# Altium PCB 2.PcbDoc
Units mm, origin at the board's own origin, x right, y up, seen from the top; angles counter-clockwise.
Board outline 48.6 x 43.89 mm, 2 copper layers (Top Layer, Bottom Layer); 53 components, 33 nets, 159 pads, 24 vias.
Unrouted connection lines stored in the file: 5.
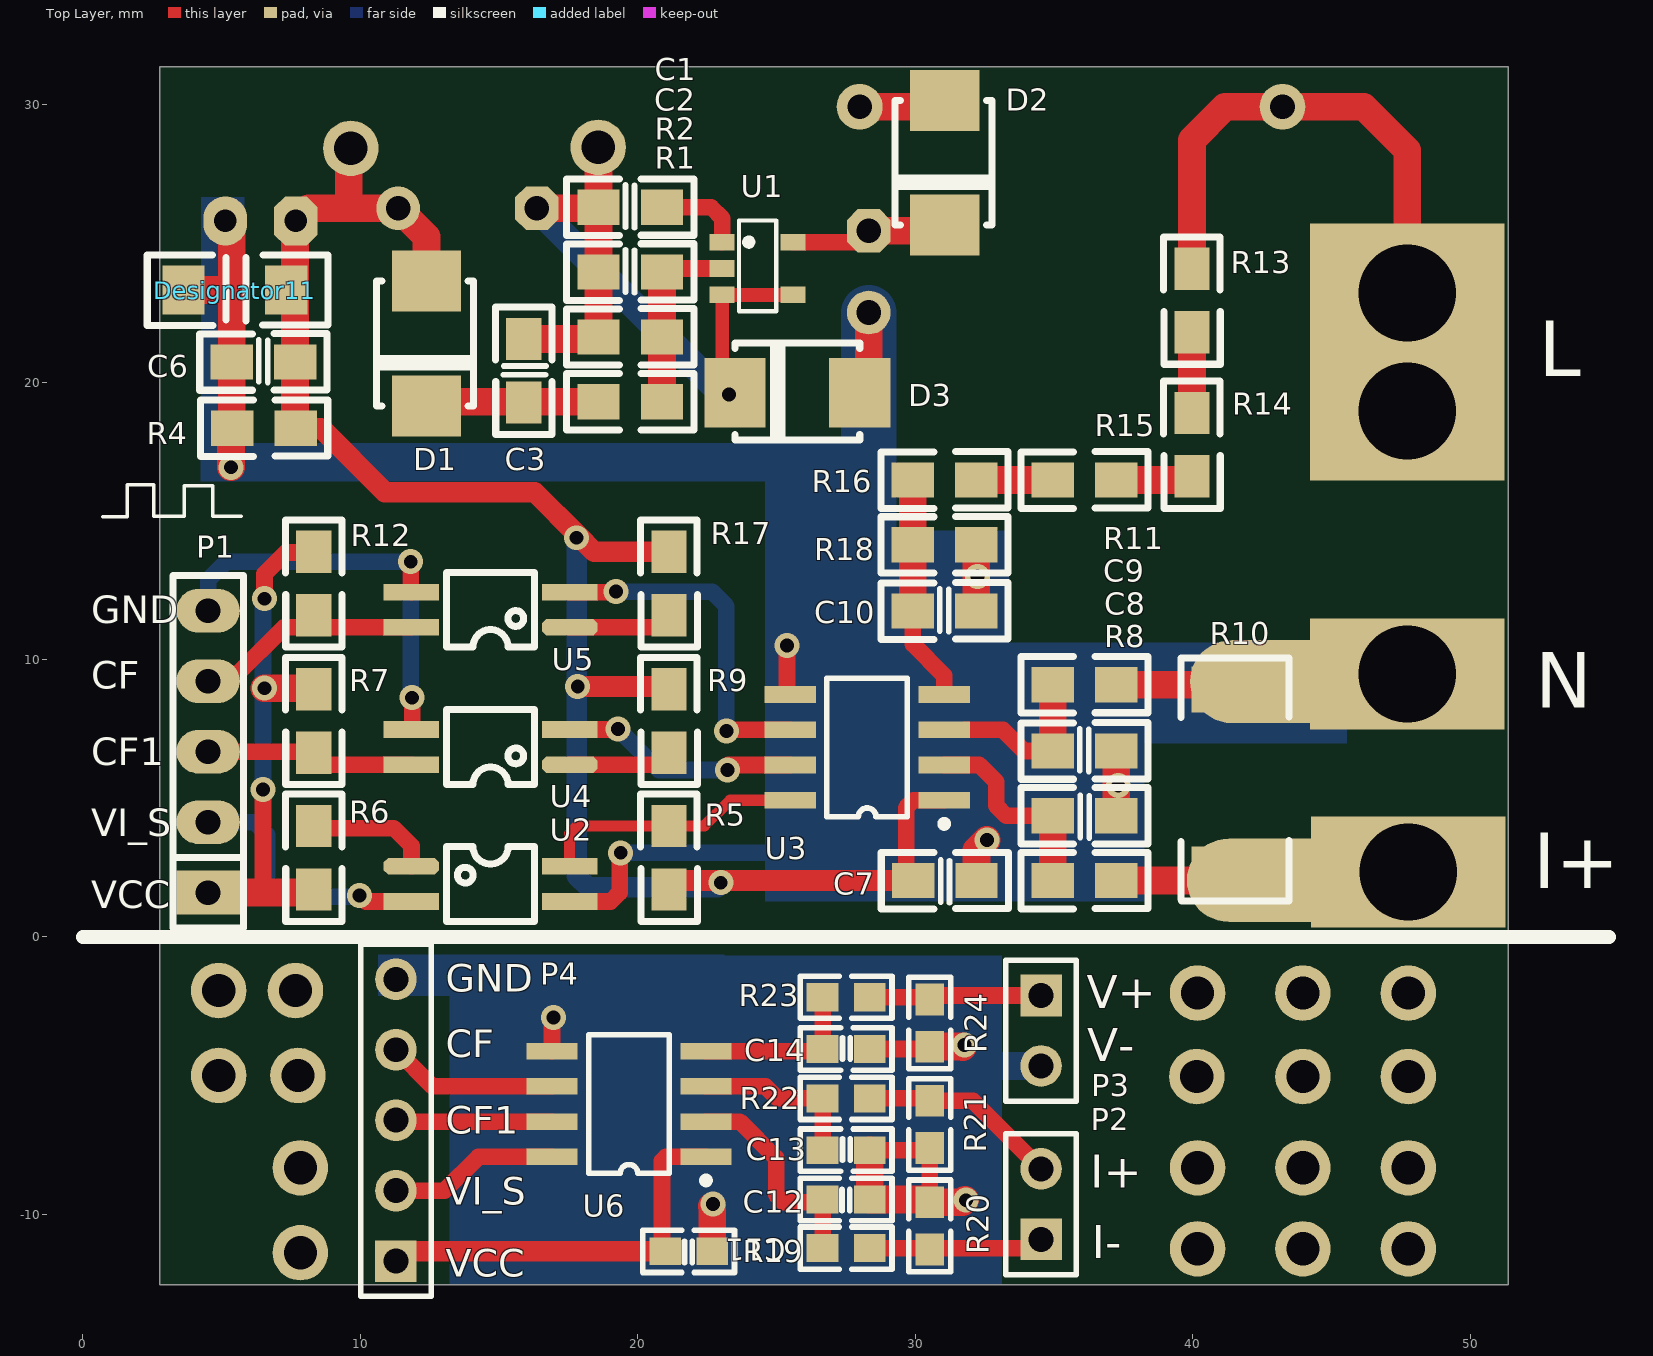
[diagram p0: Top Layer view]
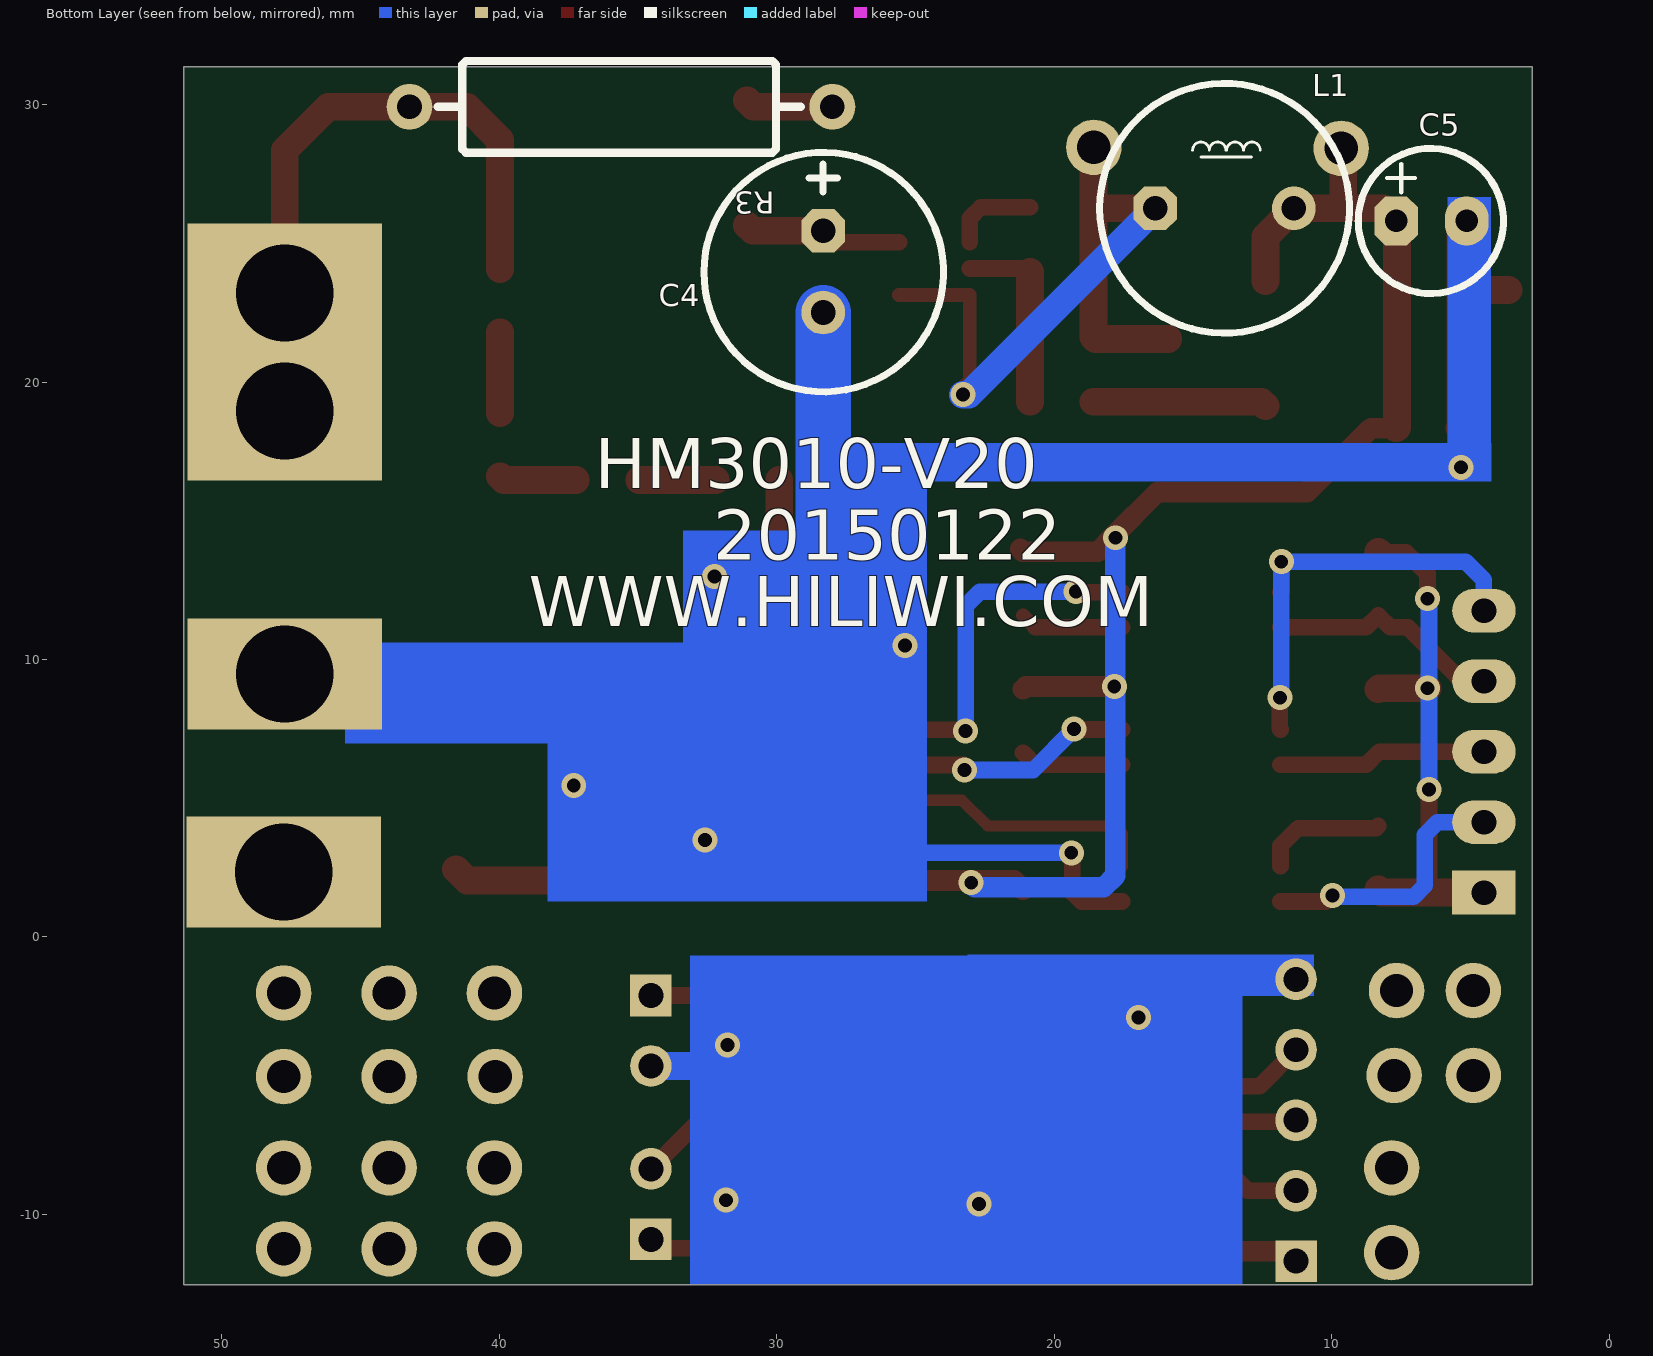
[diagram p1: Bottom Layer view, seen from below]

## Layer stack, top to bottom
Top Solder: solder mask 0.0102, Solder Resist, Dk 3.5
Top Layer: signal copper 0.0356
Dielectric1: dielectric 0.32, FR-4, Dk 4.8
Bottom Layer: signal copper 0.0356
Bottom Solder: solder mask 0.0102, Solder Resist, Dk 3.5

## Board outline
2.763,-12.536 51.366,-12.536 51.366,31.356 2.763,31.356

## Design rules (kind name [scope] priority, off if disabled: settings)
Clearance [All] p1: gap=0.254
ComponentClearance [All] p1 off: gap=0.254 collisioncheckmode=3 verticalgap=0.254 showdistances=FALSE
FabricationTestPointUsage TestPointUsage [All] p1: valid=0 allowmultiple=FALSE
FabricationTestpoint Testpoint [All] p1: side=3 testpointundercomponent=TRUE minsize=1.016 maxsize=2.54 preferedsize=1.524 minholesize=0 maxholesize=1.016 preferedholesize=0.813 testpointgrid=0.025 allowsidetop=TRUE allowsidebottom=TRUE usegrid=TRUE gridtolerance=0
FanoutControl Fanout_LCC [All] p1 off: bgadir=Out bgaviamode=Centered fanoutstyle=Auto fanoutdirection=Alternating viagrid=0.025 // Protel DXP Scope 1 Expression Was: IsLCC   Fanout_LCC (Default Rule)
FanoutControl Fanout_BGA [All] p2 off: bgadir=Out bgaviamode=Centered fanoutstyle=Auto fanoutdirection=Alternating viagrid=0.025 // Protel DXP Scope 1 Expression Was: IsBGA   Fanout_BGA (Default Rule)
FanoutControl Fanout_SOIC [All] p3 off: bgadir=Out bgaviamode=Centered fanoutstyle=Auto fanoutdirection=Alternating viagrid=0.025 // Protel DXP Scope 1 Expression Was: IsSOIC   Fanout_SOIC (Default Rule)
FanoutControl Fanout_Default [All] p4: bgadir=Out bgaviamode=Centered fanoutstyle=Auto fanoutdirection=Alternating viagrid=0.025 // Fanout_Default (Default Rule)
FanoutControl Fanout_Small [All] p5 off: bgadir=Out bgaviamode=Centered fanoutstyle=Auto fanoutdirection=Alternating viagrid=0.025 // Protel DXP Scope 1 Expression Was: (CompPinCount < 5)   Fanout_Small (Default Rule)
Height [All] p1 off: minheight=0 maxheight=25.4 prefheight=12.7
HoleSize [All] p1 off: absolutevalues=TRUE maxlimit=2.54 minlimit=0.025 maxpercent=80.000 minpercent=20.000
HoleToHoleClearance [All] p1 off: gap=0.254 allowstackedmicrovias=TRUE
LayerPairs [All] p1 off: enforce=TRUE
MinimumSolderMaskSliver [All] p1 off: minsoldermaskwidth=0.254
NetAntennae [All] p1 off: netantennaetolerance=0
PolygonConnect [All] p1: connectstyle=Relief reliefconductorwidth=0.254 reliefentries=4 polygonreliefangle="90 Angle" airgapwidth=0.254
RoutingVias [All] p1: holewidth=0.711 width=1.27 viastyle="Through Hole" minholewidth=0.5 minwidth=0.9 maxholewidth=0.711 maxwidth=1.27
SilkToSilkClearance [All] p1 off: silktosilkclearance=0.254
SilkToSolderMaskClearance SilkscreenOverComponentPads [All] p1 off: minsilkscreentomaskgap=0.254 clearancetoexposedcopper=TRUE
SolderMaskExpansion [All] p1: expansion=0.102
Width [All] p1: maxlimit=2 minlimit=0.254 preferedwidth=0.4
13 further rules are at their usual default settings.

## Components (designator, comment, footprint, x,y, rotation, side; value= is the part's Value field where it differs from the comment)
C1 "1nF/50V" C0805A 20.866,23.965 r180 top
C2 "2.2uF/10V" C0805A 20.866,26.302 r180 top
C3 "220nF/16V" C0805A 15.888,19.266 r90 top
C4 "4.7uF/400V" RB.1/.3 28.321,23.927 r270 bottom
C5 "100uF/6.3V" RB.1/.2 7.671,25.806 r180 bottom
C6 "1uF/50V" C0805A 7.645,20.726 r180 top
C7 "0.1uF" C0805A 29.921,2.032 r0 top
C8 "33nf" C0805A 34.95,4.369 r0 top
C9 "33nf" C0805A 37.236,6.706 r180 top
C10 "33nF" C0805A 32.194,11.747 r180 top
C11 "0.1uF" C0603 20.98,-11.328 r0 top
C12 "33nf" C0603 26.656,-9.461 r0 top
C13 "33nf" C0603 28.356,-7.683 r180 top
C14 "33nF" C0603 28.356,-4.039 r180 top
D1 "1N4007" DO-214 12.383,19.139 r90 top
D2 "1N4007" DO-214 31.064,25.654 r90 top
D3 "US1J/600V.1A" DO-214 23.495,19.609 r0 top
Designator11 "Comment" C1206 5.486,23.317 r180 top
L1 "1mH 320mA 8*10" L-8*10 16.358,26.264 r180 bottom
P1 "OutPut" SIP5 4.508,1.6 r90 top
P2 "Input" HDR1X2 34.531,-10.897 r90 top
P3 "Input" HDR1X2 34.531,-2.108 r270 top
P4 "OutPut" HDR1X5 11.278,-11.684 r90 top
R1 "4.99KΩ/1%" R0805 20.866,19.291 r180 top
R2 "4.99KΩ/1%" R0805 20.866,21.628 r180 top
R3 "39Ω/1W" AXIAL0.6 43.231,29.921 r180 bottom
R4 "10KΩ" R0805 5.385,18.339 r0 top
R5 "2KΩ" R0805 21.12,4 r270 top
R6 "1KΩ" R0805 8.319,4 r270 top
R7 "2KΩ" R0805 8.319,8.928 r270 top
R8 "1K" R0805 34.95,2.032 r0 top
R9 "1KΩ" R0805 21.12,8.928 r270 top
R10 "0.002Ω/2W" R2512 41.554,2.438 r90 top
R11 "1K" R0805 34.95,9.093 r0 top
R12 "2KΩ" R0805 8.319,13.881 r270 top
R13 "470K" R0805 39.967,24.079 r270 top
R14 "470K" R0805 39.967,18.888 r270 top
R15 "470K" R0805 37.236,16.472 r180 top
R16 "470K" R0805 32.194,16.472 r180 top
R17 "1KΩ" R0805 21.12,13.881 r270 top
R18 "1K" R0805 32.194,14.135 r180 top
R19 "1K" R0603 26.645,-11.201 r0 top
R20 "1Ω" R0603 30.531,-9.55 r270 top
R21 "1Ω" R0603 30.531,-5.893 r270 top
R22 "1K" R0603 26.645,-5.804 r0 top
R23 "1K" R0603 26.645,-2.159 r0 top
R24 "50Ω" R0603 30.505,-3.962 r90 top
U1 "MP150" SOT-23-5 23.038,25.044 r0 top
U2 "PS2811-1" PS2811-SOP4 11.839,2.548 r0 top
U3 "HLW8012" SOP8 31.039,4.928 r90 top
U4 "PS2811-1" PS2811-SOP4 17.539,6.206 r180 top
U5 "PS2811-1" PS2811-SOP4 17.539,11.159 r180 top
U6 "HLW8012" SOP8 22.454,-7.925 r90 top

## Footprints (in the part's own frame and the unit in brackets; to place one, negate y for a bottom-side part, rotate by r counter-clockwise, add the part's x,y. Pads: shape width x height; smd on the part's side, far side on the other; paste and mask are expansions set on the pad)
AXIAL0.6 [mil]
  round 65 hole 35: 1(0,0) 2(600,0)
  silkscreen extent 40,-65 555,65
C0603 [mm]
  rect 1.143x1 smd: 1(0,0) 2(1.7,0)
  silkscreen extent -0.8,-0.76 2.5,0.76
C0805A [mil]
  rect 60x50 smd: 1(0,0) 2(90,0)
  silkscreen extent -45,-40 135,40
C1206 [mil]
  rect 60x70 smd: 1(-72.44,0) 2(73.23,0)
  silkscreen extent -131,-50 125,50
DO-214 [mm]
  rect 2.2x2.5 smd: 1(4.5,0) 2(0,0)
  silkscreen extent 0,-1.7 4.5,1.8
HDR1X2 [mm]
  rect 1.5x1.5 hole 0.9: 1(0,0)
  round 1.5 hole 0.9: 2(2.54,0)
  silkscreen extent -1.27,-1.27 3.81,1.27
HDR1X5 [mm]
  rect 1.5x1.5 hole 0.9: 1(0,0)
  round 1.5 hole 0.9: 2(2.54,0) 3(5.08,0) 4(7.62,0) 5(10.16,0)
  silkscreen extent -1.27,-1.27 11.43,1.27
L-8*10 [mil]
  oct 62x62 hole 35: 1(0,0)
  round 62 hole 35: 2(196.85,0)
  silkscreen extent -79,-177 275,177
PS2811-SOP4 [mm]
  oct 2x0.6 smd: 1(0,0)
  rect 2x0.6 smd: 2(0,-1.27) 3(5.7,-1.27) 4(5.7,0)
  silkscreen extent 1.27,-1.98 4.43,0.71
R0603 [mil]
  rect 45x40 smd: 1(0.45,-0.52) 2(67.38,-0.52)
  silkscreen extent -31,-31 99,29
R0805 [mil]
  rect 60x50 smd: 1(0,0) 2(90,0)
  silkscreen extent -45,-40 135,40
R2512 [mm]
  rect 1.65x3.2 smd: 1(0,0) 2(6.48,0)
  silkscreen extent -1.14,-1.92 7.62,1.98
RB.1/.2 [mil]
  oct 62x70 hole 32: 1(0,0)
  oval 62x70 hole 32: 2(100,0)
  silkscreen extent -54,-103 152,103
RB.1/.3 [mil]
  oct 62x62 hole 35: 1(-60,0)
  round 62 hole 35: 2(56,0)
  silkscreen extent -171,-169 168,170
SIP5 [mil]
  rect 62x90 hole 35: 1(0,0)
  oval 62x90 hole 35: 2(100,0) 3(200,0) 4(300,0) 5(400,0)
  silkscreen extent -50,-50 450,50
SOP8 [mm]
  rect 0.6x1.85 smd: 1(0,0) 2(1.27,0) 3(2.54,0) 4(3.81,0) 5(3.81,5.55) 6(2.54,5.55) 7(1.27,5.55) 8(0,5.55)
  silkscreen extent -0.97,-0.13 4.41,4.23
SOT-23-5 [mm]
  rect 0.9x0.6 smd: 1(0,0) 2(0,-0.95) 3(0,-1.9) 4(2.55,-1.9) 5(2.55,0)
  silkscreen extent 0.61,-2.49 1.95,0.78

## Free pads (board coordinates)
  oval 6x3 smd: 0(42.786,2.045) 0(42.901,9.207)
  round 2 hole 1.2: 1(40.17,-2.019) 2(43.967,-2.019) 3(47.765,-2.019) 5(40.145,-5.029) 6(43.967,-5.029) 7(47.765,-5.029) 9(40.17,-8.319) 10(43.967,-8.319) 11(47.765,-8.319) 12(40.17,-11.239) 13(43.967,-11.239) 14(47.765,-11.239) 16(4.889,-1.93) 18(4.889,-4.991) 19(7.747,-4.991) 20(7.836,-8.319) 21(7.836,-11.379) 23(7.658,-1.93) 24(9.652,28.423) 24(18.567,28.461)
  rect 7x4 hole 3.5: 2(47.727,9.474) 2(47.765,2.337)
  rect 7x5 hole 3.5: 2(47.727,18.961) 2(47.727,23.216)

## Via types
v1: diameter 0.9, hole 0.5, Top Layer to Bottom Layer, 24 vias

## Nets (pads, with @x,y where several pads share a name; then routed paths per layer and width w, separated by ;. In a path a pad name is that pad's centre, name@x,y a point inside that pad or via, vN(x,y) a via of type N, cw(c..) or ccw(c..) an arc to the next point about the centre after c; other vN are vias at no path point)
+3.3V: P1.1 R6.2 R7.1 R12.1 | length 19.4
  Top Layer w0.6: 6.49,1.6 v1(6.49,5.321) 6.49,5.347 v1@6.502,5.359 ; v1(6.54,12.192) 6.54,13.081 7.315,13.856 8.293,13.856 R12.1
  Top Layer w1: P1.1 6.49,1.6 8.204,1.6 R6.2 ; v1(6.54,8.966) 8.28,8.966 R7.1 ; R12.1@8.293,13.856 R12.1
  Bottom Layer w0.6: v1(6.49,5.321) 6.49,8.966 6.49,12.179 6.502,12.192 v1(6.54,12.192)
+5V: C5.1 C6.1 C7.1 C11.1 D1.1 Designator11.1 L1.2 P4.1 pad.24@9.652,28.423 R4.2 R5.2 R9.1 R17.1 U3.1 U6.1 | length 85.1
  Top Layer w0.6: C11.1 20.866,-11.214 20.866,-8.064 21.006,-7.925 U6.1 ; C7.1 29.667,2.286 29.667,4.661 29.934,4.928 U3.1 U3.1@30.15,4.928
  Top Layer w0.75: 7.645,19.291 7.645,19.304 ; R4.2 8.572,18.339 10.884,16.027 12.852,16.027 ; 10.909,16.027 12.852,16.027 ; P4.1 11.633,-11.328 C11.1 ; v1(17.831,9.03) 21.018,9.03 R9.1 ; R5.2 21.438,2.032 22.987,2.032 C7.1 ; R17.1@21.222,13.983 R17.1 18.428,13.881 17.856,14.453 16.281,16.027 12.852,16.027
  Top Layer w1: 7.645,19.304 C6.1 ; R4.2 7.645,18.364 7.645,19.291 C6.1 ; pad.24@9.665,28.423 9.658,28.416 9.576,28.334 9.576,26.264 ; D1.1 12.383,25.239 L1.2 9.576,26.264 ; C6.1 7.645,23.317 7.645,25.781 C5.1 8.128,26.264 9.576,26.264
  Bottom Layer w0.75: v1(17.793,14.389) 17.793,9.03 17.793,2.21 18.212,1.791 22.86,1.791 v1@22.885,1.816
  other v1: 22.987,1.956
CF: P1.4 R12.2 U5.4 | length 8.5
  Top Layer w0.6: P1.4 5.321,9.22 5.487,9.385 5.487,9.403 7.243,11.159 7.882,11.159 R12.2 8.755,11.159 U5.4
CF1: P1.3 R7.2 U4.4 | length 7.5
  Top Layer w0.6: P1.3 8.28,6.68 R7.2 8.755,6.206 U4.4
CF1_S: P1.2 U2.2 | length 9.5
  Top Layer w0.6: v1(9.97,1.499) 10.19,1.278 U2.2
  Bottom Layer w0.6: P1.2 6.185,4.14 6.642,3.683 6.642,1.854 7.048,1.448 v1@9.881,1.448
DGND: C11.2 C12.2 C13.1 C14.1 P1.5 P3.2 P4.5 R20.1 R21.2 R24.1 U4.3 U5.3 U6.5 | length 36.8
  Top Layer w0.6: v1(11.811,13.525) 11.811,12.457 U5.3 ; U4.3 11.862,7.499 v1(11.862,8.623) ; U6.5 v1@16.904,-2.934 ; C13.1 30.438,-7.683 R21.2 R20.1 ; C14.1 30.43,-4.039 R24.1
  Top Layer w1: v1@22.669,-9.703 22.68,-9.714 C11.2 ; C13.1 C12.2 30.417,-9.461 R20.1 31.7,-9.562 v1@31.788,-9.474 ; R24.1 31.688,-3.951 31.699,-3.962 v1@31.712,-3.975
  Bottom Layer w0.6: P1.5 4.508,12.865 ; 4.801,13.157 4.508,12.865 ; v1@11.747,8.623 11.805,8.68 11.811,8.687 v1(11.811,13.525) 5.169,13.525 4.508,12.865
  Bottom Layer w1: 29.858,-5.118 30.328,-4.648 31.775,-4.648 P3.2
  other v1: 22.708,-9.627 31.826,-9.487 31.775,-3.886 16.954,-2.896
GND: C4.2 C5.2 C6.2 C7.2 C8.2 C9.1 C10.1 D3.1 Designator11.2 pad.0@42.901,9.207 pad.2@47.727,9.474 R4.1 R10.2 R11.2 R18.1 U2.3 U3.5 | length 75.8
  Top Layer w0.6: U2.3 19.02,1.278 19.342,1.6 v1@19.342,2.959 ; v1(25.375,10.503) 25.375,8.852 U3.5
  Top Layer w1: Designator11.2 5.359,23.317 ; C5.2 5.359,25.578 5.359,23.317 ; v1(5.334,16.929) 5.334,18.288 R4.1 5.359,18.364 C6.2 ; 5.359,19.304 C6.2 ; D3.1 28.321,19.935 C4.2 ; C10.1 32.194,12.992 R18.1 ; C7.2 32.207,3.124 v1(32.575,3.492) ; C8.2 37.236,5.461 C9.1 ; R11.2 41.38,9.093 R10.2 ; C6.2 5.359,23.317
  Bottom Layer w0.6: v1(19.38,3.035) 32.118,3.035 v1(32.575,3.492)
  Bottom Layer w2: C4.2 28.321,11.557 30.404,9.474 47.727,9.474 pad.2@47.866,9.474
  other v1: 37.313,5.461 32.245,12.992
I+: pad.0@42.786,2.045 pad.2@47.765,2.337 R8.2 R10.1 | length 4.5
  Top Layer w1: R8.2 41.148,2.032 R10.1
L: pad.2@47.727,18.961 pad.2@47.727,23.216 R3.1 R13.1 | length 18.7
  Top Layer w1: R13.1 39.967,28.727 41.161,29.921 R3.1 46.164,29.921 47.727,28.359 pad.2@47.727,23.216
NetC1_1: C1.1 R1.1 R2.1 U1.2 | length 6.9
  Top Layer w0.6: C1.1 20.996,24.094 U1.2
  Top Layer w1: R1.1 C1.1
NetC1_2: C1.2 C2.2 C3.2 D3.2 L1.1 pad.24@18.567,28.461 R2.2 U1.3 U1.4 | length 27.8
  Top Layer w0.5: D3.2 23.419,19.685 23.038,20.066 U1.3 U1.4
  Top Layer w1: C3.2 18.504,21.552 R2.2 C1.2 C2.2 ; L1.1 18.542,26.264 C2.2 ; pad.24@18.567,28.461 18.58,28.448 C2.2
  Bottom Layer w1: L1.1 23.076,19.545 v1(23.279,19.545)
NetC2_1: C2.1 U1.1 | length 3.2
  Top Layer w0.6: C2.1 22.644,26.302 23.038,25.908 U1.1
NetC3_1: C3.1 D1.2 R1.2 | length 6.3
  Top Layer w1: D1.2 12.535,19.291 R1.2
NetC4_1: C4.1 D2.2 U1.5 | length 5.7
  Top Layer w0.6: U1.5 27.915,25.044 C4.1
  Top Layer w1: C4.1 30.861,25.451 D2.2
NetC8_1: C8.1 R8.1 U3.2 | length 7.5
  Top Layer w0.6: U3.2 32.309,6.198 32.918,5.588 32.918,4.724 33.274,4.369 C8.1
  Top Layer w1: R8.1 C8.1
NetC9_2: C9.2 R11.1 U3.3 | length 5.9
  Top Layer w0.6: U3.3@31.775,7.468 33.16,7.468 33.922,6.706 C9.2
  Top Layer w1: C9.2 R11.1
NetC12_1: C12.1 R19.1 U6.2 | length 8
  Top Layer w0.6: U6.2 23.673,-6.655 24.981,-7.963 24.981,-9.296 25.248,-9.563 26.554,-9.563 C12.1 R19.1
NetC13_2: C13.2 R22.1 U6.3 | length 6.2
  Top Layer w0.6: U6.3 24.6,-5.385 25.032,-5.817 R22.1 C13.2
NetC14_2: C14.2 R23.1 U6.4 | length 6.1
  Top Layer w0.6: U6.4 26.58,-4.115 C14.2 R23.1
NetD2_1: D2.1 R3.2 | length 3.2
  Top Layer w1: R3.2 30.831,29.921 D2.1
NetP2_1: P2.1 R19.2 R20.2 | length 6.4
  Top Layer w0.6: R19.2 R20.2@30.47,-11.215 ; R20.2 R20.2@30.47,-11.215 ; P2.1 34.213,-11.215 30.518,-11.215 R20.2@30.47,-11.215
NetP2_2: P2.2 R21.1 R22.2 | length 7.2
  Top Layer w0.6: R22.2 30.43,-5.817 R21.1 32.079,-5.904 P2.2
NetP3_1: P3.1 R23.2 R24.2 | length 6.3
  Top Layer w0.6: R23.2 30.439,-2.172 R24.2 30.66,-2.108 P3.1
NetR6_1: R6.1 U2.1 | length 4.6
  Top Layer w0.6: R6.1 8.395,3.924 11.201,3.924 11.839,3.287 U2.1
NetR9_2: R9.2 U4.1 | length 3.8
  Top Layer w0.6: U4.1 20.684,6.206 R9.2
NetR13_2: R13.2 R14.1 | length 2.9
  Top Layer w1: R14.1 R13.2
NetR14_2: R14.2 R15.1 | length 2.8
  Top Layer w1: R15.1 39.837,16.472 R14.2
NetR15_2: R15.2 R16.1 | length 2.8
  Top Layer w1: R16.1 R15.2
NetR17_2: R17.2 U5.1 | length 3.8
  Top Layer w0.5: R17.2@20.684,11.159 R17.2
  Top Layer w0.6: U5.1 R17.2@20.684,11.159
P_CF: P4.4 U3.6 U5.2 U6.6 | length 18.7
  Top Layer w0.6: P4.4 12.598,-5.385 U6.6 ; U5.2 19.147,12.429 v1@19.152,12.433 ; v1(23.19,7.429) 23.228,7.468 U3.6
  Bottom Layer w0.6: v1(19.215,12.446) 22.669,12.446 23.19,11.925 v1@23.19,7.48
V2P: C10.2 R16.2 R18.2 U3.4 | length 8.2
  Top Layer w0.6: C10.2 29.909,10.554 31.039,9.423 U3.4
  Top Layer w1: C10.2 R18.2 R16.2
VI_CF: P4.3 U3.7 U4.2 U6.7 | length 14.2
  Top Layer w0.6: P4.3 11.328,-6.655 U6.7 ; U4.2 19.245,7.476 19.253,7.468 v1@19.266,7.455 ; v1@23.266,6.198 U3.7
  Bottom Layer w0.6: v1(19.279,7.493) 20.752,6.02 v1(23.228,6.02)
VI_S: P4.2 R5.1 U2.4 U3.8 U6.8 | length 15.8
  Top Layer w0.4: U2.4 17.539,3.734 17.805,4 R5.1 22.39,4 23.317,4.928 U3.8
  Top Layer w0.6: P4.2 13.03,-9.144 14.249,-7.925 U6.8

## Other copper
Bottom Layer:
  rectangle net DGND: 13.208,-12.522 33.122,-0.66
  rectangle net DGND: 10.63,-2.134 23.114,-0.635
  rectangle net GND: 33.858,6.972 45.555,10.617
  rectangle net GND: 26.01,1.27 33.884,10.617
  rectangle net GND: 31.953,1.283 38.265,10.135
  rectangle net GND: 36.424,3.632 38.214,9.601
  rectangle net GND: 24.663,10.071 33.376,14.643
  rectangle net GND: 24.575,1.27 28.6,17.59
  rectangle net GND: 4.255,16.916 5.829,26.67
  rectangle net GND: 4.229,16.421 28.194,17.805

## Silkscreen, mask and mechanical layers (free items; w line width, h text height)
Top Overlay:
  lines w0.127: 0.711,15.151 1.587,15.151 1.587,16.294 1.727,16.294 2.553,16.294 2.553,15.164 3.658,15.164 3.658,16.269 4.674,16.269 4.674,15.164 5.702,15.164
  lines w0.5: 0,0 55,0
  text "L" at 52.464,20.218 h2
  text "GND" at 0.305,11.316 h1
  text "CF" at 0.305,8.954 h1
  text "N" at 52.337,8.255 h2
  text "CF1" at 0.305,6.198 h1
  text "VI_S" at 0.305,3.632 h1
  text "I+" at 52.261,1.765 h2
  text "VCC" at 0.305,1.041 h1
  text "GND" at 13.068,-1.968 h1
  text "V+" at 36.17,-2.565 h1.2
  text "CF" at 13.068,-4.331 h1
  text "V-" at 36.195,-4.47 h1.2
  text "CF1" at 13.068,-7.087 h1
  text "I+" at 36.309,-9.042 h1.2
  text "VI_S" at 13.068,-9.652 h1
  text "I-" at 36.36,-11.582 h1.2
  text "VCC" at 13.068,-12.243 h1
Bottom Overlay:
  text "HM3010-V20" at 36.551,16.18 h1.8
  text "20150122" at 32.283,13.602 h1.8
  text "WWW.HILIWI.COM" at 38.925,11.201 h1.8
Mechanical 1:
  circle w0.254: c3,29 r1.6
  circle w0.254: c3,-10 r1.6
  circle w0.254: c52,-10 r1.6
  circle w0.254: c52,29 r1.6
  lines w0.127: 0,-13 0,32 55,32 55,-13 0,-13
  lines w1: 14.58,0.826 14.58,13.805
  lines w1.5: 40.92,13.881 54.889,13.881